# Allegro board msd_foot_main.brd
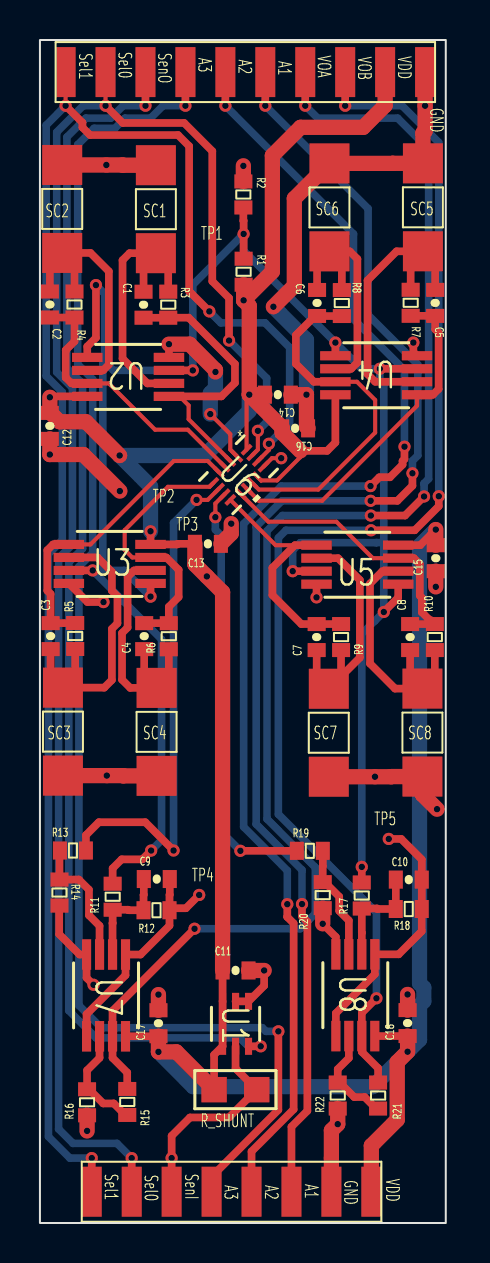
[diagram p0: board, top side]
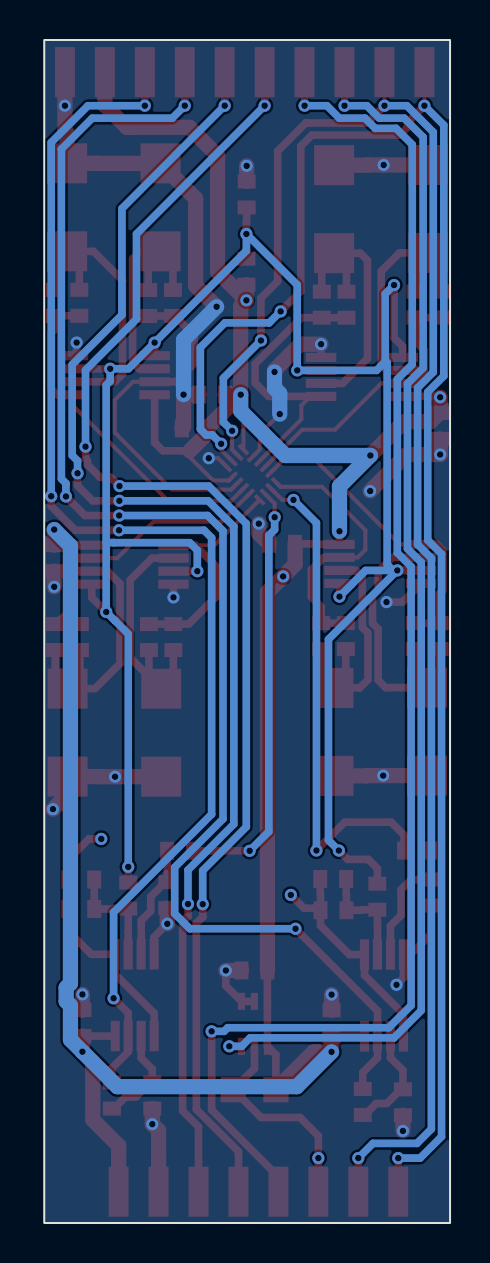
[diagram p1: board, bottom side, seen from below]

Outline 20.32 x 59.17 mm; copper layers: TOP, BOTTOM. Coordinates in mm from the lower left corner of the outline.
Outline path: rectangle 0,0 20.32,59.17

## Design rules (mm)
constraint set DEFAULT: min track width 0.381

## Placement (name value [footprint] x y rotation side)
C1  47pF  [0402-CAP]  5.19 45.93 270 top
C2  47pF  [0402-CAP]  0.5 45.94 270 top
C3  47pF  [0402-CAP]  0.53 29.35 90 top
C4  47pF  [0402-CAP]  5.22 29.35 90 top
C5  47pF  [0402-CAP]  19.79 46.02 270 top
C6  47pF  [0402-CAP]  13.88 46.02 270 top
C7  47pF  [0402-CAP]  13.86 29.31 90 top
C8  47pF  [0402-CAP]  18.53 29.31 90 top
C9  470p  [0402-CAP]  5.85 17.2 0 top
C10  470p  [0402-CAP]  18.47 17.18 0 top
C11  0.1u  [0402-CAP]  9.79 12.63 180 top
C12  0.1u  [0402-CAP]  0.5 39.87 90 top
C13  0.1u  [0402-CAP]  8.41 33.97 180 top
C14  0.1u  [0402-CAP]  11.91 41.43 180 top
C15  0.1u  [0402-CAP]  19.82 33.25 90 top
C16  0.1uF  [0402-CAP]  12.78 39.75 180 top
C17  0.1uF  [0402-CAP]  5.93 9.99 90 top
C18  0.1uF  [0402-CAP]  18.41 10 90 top
IO1  -  [EXT1_MAIN_CONNECTOR]  9.59 1.56 270 top
IO2  MAIN_NANO_CONNECTOR  [MAIN_CONNECTOR]  10.28 57.56 270 top
NOREF  -  []  -42.31 -125.64 0 top
NOREF#2  -  []  20.32 0 90 top
NOREF#3  -  []  0 59.17 0 top
R1  10k  [0402-RES]  10.2 47.58 270 top
R2  1k  [0402-RES]  10.19 51.44 270 top
R3  20k  [0402-RES]  6.42 45.93 270 top
R4  20k  [0402-RES]  1.73 45.94 270 top
R5  20k  [0402-RES]  1.77 29.36 90 top
R6  20k  [0402-RES]  6.45 29.35 90 top
R7  20k  [0402-RES]  18.56 46.02 270 top
R8  20k  [0402-RES]  15.12 46.01 270 top
R9  20k  [0402-RES]  15.08 29.31 90 top
R10  20k  [0402-RES]  19.77 29.31 90 top
R11  100k  [0402-RES]  3.64 16.32 90 top
R12  100k  [0402-RES]  5.84 15.64 180 top
R13  100k  [0402-RES]  1.65 18.63 180 top
R14  120k  [0402-RES]  0.98 16.53 90 top
R15  20k  [0402-RES]  4.37 6.06 270 top
R16  10k  [0402-RES]  2.36 6.04 90 top
R17  100k  [0402-RES]  16.11 16.38 90 top
R18  100k  [0402-RES]  18.47 15.7 180 top
R19  100k  [0402-RES]  13.51 18.62 0 top
R20  120k  [0402-RES]  14.16 16.4 90 top
R21  20k  [0402-RES]  16.93 6.38 270 top
R22  10k  [0402-RES]  14.91 6.38 90 top
R_SHUNT  1  [SMR0805]  10.85 6.67 180 top
SC1  Strain Cell  [STRAIN_CELL]  5.8 50.71 270 top
SC2  Strain Cell  [STRAIN_CELL]  1.12 50.72 270 top
SC3  Strain Cell  [STRAIN_CELL]  1.15 24.58 90 top
SC4  Strain Cell  [STRAIN_CELL]  5.84 24.56 90 top
SC5  Strain Cell  [STRAIN_CELL]  19.17 50.8 270 top
SC6  Strain Cell  [STRAIN_CELL]  14.5 50.8 270 top
SC7  Strain Cell  [STRAIN_CELL]  14.46 24.52 90 top
SC8  Strain Cell  [STRAIN_CELL]  19.15 24.53 90 top
U1  INA212AIDCKTG4  [DCK6_TEX]  9.79 9.96 270 top
U2  MCP6002-IMS  [MSOP8_MC_MCH]  4.41 42.32 180 top
U3  MCP6002-IMS  [MSOP8_MC_MCH]  3.49 32.96 0 top
U4  MCP6002-IMS  [MSOP8_MC_MCH]  16.84 42.4 180 top
U5  MCP6002-IMS  [MSOP8_MC_MCH]  15.89 32.93 0 top
U6  TMUX1109RSVR  [RSV16_TEX]  9.94 37.42 315 top
U7  MCP6002-IMS  [MSOP8_MC_MCH]  3.31 11.38 270 top
U8  MCP6002-IMS  [MSOP8_MC_MCH]  15.79 11.39 270 top

## Library data of the parts
C1-C18 = CAP NP
IO1 = EXT1_MAIN_CONNECTOR_0
IO2 = MAIN_NANO_CONNECTOR_1
R1-R22 R_SHUNT = R
SC1-SC8 = Strain Cell
U1 = INA212AIDCKT
U2-U5 U7 U8 = MCP6002-IMS
U6 = TMUX1109RSVR

## Footprints (pads in the part's own frame, mm; a bottom-side part is the same pattern mirrored in y, then rotated)
0402-CAP
  rect 0.7x0.9 smd: 1(-0.65,0) 2(0.65,0)
0402-RES
  rect 0.7x0.9 smd: 1(-0.65,0) 2(0.65,0)
DCK6_TEX
  rect 0.851x0.356 smd: 1(-1.124,0.65) 2(-1.124,0) 3(-1.124,-0.65) 4(1.124,-0.65) 5(1.124,0) 6(1.124,0.65)
EXT1_MAIN_CONNECTOR
  rect 2.5x1 smd: 1(0,7) 2(0,5) 3(0,3) 4(0,1) 5(0,-1) 6(0,-3) 7(0,-5) 8(0,-7)
MAIN_CONNECTOR
  rect 2.5x1 smd: 1(0,9) 2(0,7) 3(0,5) 4(0,3) 5(0,1) 6(0,-1) 7(0,-3) 8(0,-5) 9(0,-7) 10(0,-9)
MSOP8_MC_MCH
  rect 1.524x0.457 smd: 1(-2.045,0.975) 2(-2.045,0.325) 3(-2.045,-0.325) 4(-2.045,-0.975) 5(2.045,-0.975) 6(2.045,-0.325) 7(2.045,0.325) 8(2.045,0.975)
RSV16_TEX
  rect 0.75x0.2 smd: 1(-0.724,0.6)
  rect 0.65x0.2 smd: 2(-0.775,0.2) 3(-0.775,-0.2) 4(-0.775,-0.6) 9(0.775,-0.6) 10(0.775,-0.2) 11(0.775,0.2) 12(0.775,0.6)
  rect 0.2x0.65 smd: 5(-0.6,-1.175) 6(-0.2,-1.175) 7(0.2,-1.175) 8(0.6,-1.175) 13(0.6,1.175) 14(0.2,1.175) 15(-0.2,1.175) 16(-0.6,1.175)
SMR0805
  rect 1.27x1.27 smd: 1(0,0) 2(2.134,0)
STRAIN_CELL
  rect 2x2 smd: 1(-2.2,0) 2(2.2,0)

## Nets
GND: C11.1 C12.1 C13.1 C14.1 C15.1 C16.1 C17.2 C18.2 IO1.2 IO2.1 R2.1 R14.1 R16.1 R20.1 R22.1 SC1.1 SC2.1 SC3.1 SC4.1 SC5.1 SC6.1 SC7.1 SC8.1 U1.1 U1.2 U2.4(VSS) U3.4(VSS) U4.4(VSS) U5.4(VSS) U6.1(VSS) U6.13 U7.4(VSS) U8.4(VSS)
VDD: C11.2 C12.2 C13.2 C14.2 C15.2 C16.2 C17.1 C18.1 IO1.1(VDD) IO2.2 R1.2 R_SHUNT.2 U1.3(V+) U1.4 U2.8 U3.8 U4.8 U5.8 U6.12 U6.16 U7.8 U8.8
SC1: C1.1 R3.1 SC1.2 U2.2
SC1_VOUT1: C1.2 R3.2 U2.1 U6.2
SC2: C2.1 R4.1 SC2.2 U2.6
SC2_VOUT1: C2.2 R4.2 U2.7 U6.3
SC3: C3.1 R5.1 SC3.2 U3.2
SC3_VOUT1: C3.2 R5.2 U3.1 U6.4
SC4: C4.1 R6.1 SC4.2 U3.6
SC4_VOUT1: C4.2 R6.2 U3.7 U6.5
SC5: C5.1 R7.1 SC5.2 U4.2
SC5_VOUT1: C5.2 R7.2 U4.1 U6.10
SC6: C6.1 R8.1 SC6.2 U4.6
SC6_VOUT1: C6.2 R8.2 U4.7 U6.11
SC7: C7.1 R9.1 SC7.2 U5.2
SC7_VOUT1: C7.2 R9.2 U5.1 U6.8
SC8: C8.1 R10.1 SC8.2 U5.6
SC8_VOUT1: C8.2 R10.2 U5.7 U6.9
SEL0: IO1.7 IO2.9 U6.15
SEL1: IO1.8 IO2.10 U6.14
SENSE_IN: IO1.6 R_SHUNT.1 U1.5
SENSE_OUT: IO2.8(SENSE) U1.6
VOUT1_A: R13.1 U6.6
VOUT1_B: R19.1 U6.7
VOUT2_A: C9.2 R12.1 U7.1 U7.5
VOUT2_B: C10.2 R18.1 U8.1 U8.5
VOUT3_A: IO2.4 R15.1 U7.7
VOUT3_B: IO2.3 R21.1 U8.7
VREF: R1.1 R2.2 R11.2 R17.2 U2.3 U2.5 U3.3 U3.5 U4.3 U4.5 U5.3 U5.5
N44752: IO1.5 IO2.7
N44756: IO1.4 IO2.6
N44760: IO1.3 IO2.5
N63015: C9.1 R11.1 R12.2 U7.2
N63095: R15.2 R16.2 U7.6
N63123: R13.2 R14.2 U7.3
N63670: C10.1 R17.1 R18.2 U8.2
N63750: R21.2 R22.2 U8.6
N63778: R19.2 R20.2 U8.3

## Via types
v1: diameter 0.61, hole 0.33, TOP to BOTTOM, 81 vias

## Routing (per net, layer and track width the routed paths; a pad name or vN(x,y) marks a point on that pad's centre or on a via; arc(x,y) is an arc through that point)
GND: length 79.5
  TOP w0.203: 11.19,37.83 11.62,38.25 v1(12.08,38.25) ; v1(8.53,40.46) 9.53,39.46 9.53,38.68 U6.1
  TOP w0.381: U4.4 18.7,43.56 v1(18.7,44.04) ; U3.4 2.38,31.06 v1(3.18,31.06) ; v1(2.68,11.92) 2.33,12.26 U7.4 1.98,13.43 0.97,14.44 0.97,15.87 R14.1 ; v1(11.23,12.63) 11.23,11.87 U1.1 U1.2 ; U5.4 v1(13.85,31.29) ; U8.4 14.82,14.31 v1(14.16,14.97) ; U2.4 v1(6.46,43.95)
  TOP w0.762: C13.1 9.58,34.49 v1(9.58,34.98) ; v1(4,36.61) 2.17,38.44 v1(0.5,38.44) C12.1 ; SC3.1 v1(3.35,22.38) 4.16,22.38 4.17,22.36 SC4.1 ; SC2.1 v1(3.32,52.92) 4.14,52.92 4.15,52.91 SC1.1 ; SC7.1 v1(16.77,22.32) 17.59,22.32 17.59,22.33 SC8.1 19.15,21.43 v1(19.88,20.7) ; R22.1 v1(14.91,4.94) 14.59,4.63 IO1.2 ; R2.1 v1(10.19,52.87) ; v1(8.79,42.57) 8.79,42.66 7.49,43.95 v1(6.46,43.95) ; C14.1 v1(13.34,41.43) 13.34,39.83 C16.1 ; C18.2 v1(18.41,11.43) ; C17.2 v1(5.93,11.42) ; v1(11.69,45.83) 12.74,46.88 12.74,51.24 SC6.1 17.66,53 17.67,53 SC5.1 19.17,54.51 19.28,54.62 v1(19.28,55.88) IO2.1 ; C15.1 v1(19.82,31.82) ; C11.1 v1(11.23,12.63) ; R20.1 v1(14.16,14.97) ; R16.1 v1(2.36,4.61)
  BOTTOM w0.762: v1(13.34,41.43) 13.34,44.17 v1(11.69,45.83) ; v1(8.53,40.46) 8.53,41.49 8.79,41.76 v1(8.79,42.57)
VDD: length 147.2
  TOP w0.203: 13.03,38.62 13.03,38.3 11.87,37.14 11.07,37.14 U6.12 ; v1(10.48,41.43) 10.35,41.29 U6.16
  TOP w0.381: U4.8 14.79,39.03 14.38,38.62 13.03,38.62 ; C17.1 5.93,9.34 U7.8 ; v1(5.54,34.6) U3.8 6.87,33.94 6.9,33.97 C13.2 ; v1(0.5,41.3) 0.54,41.34 U2.8 ; R_SHUNT.2 8.72,8.41 U1.4 U1.3 C11.2 ; v1(19.82,34.68) 19.04,33.9 U5.8 ; C18.1 U8.8
  TOP w0.762: R1.2 v1(10.2,46.15) ; v1(10.2,46.15) 10.48,45.86 v1(10.48,41.43) ; v1(10.2,46.15) 11.64,47.59 11.64,53.39 13.05,54.8 16.18,54.8 17.28,55.9 IO2.2 ; C12.2 0.5,40.56 ; 0.5,40.56 0.98,40.08 2.3,40.08 v1(3.99,38.39) ; 0.5,40.56 v1(0.5,41.3) ; C15.2 v1(19.82,34.68) ; R_SHUNT.2 6.83,8.56 v1(5.93,8.56) C17.1 ; v1(10.48,41.43) 12.13,39.78 C16.2 12.13,39.53 13.03,38.62 ; v1(10.48,41.43) C14.2 ; C13.2 7.76,32.94 v1(8.36,32.34) 9.14,31.55 C11.2 ; C18.1 v1(18.41,8.57) 17.89,8.05 17.89,5.16 16.59,3.87 IO1.1
  BOTTOM w0.762: v1(19.82,34.68) 19.01,33.87 19.01,11.98 19.22,11.77 19.22,11.09 19.01,10.88 19.01,9.17 v1(18.41,8.57) 16.66,6.82 7.67,6.82 v1(5.93,8.56) ; v1(10.48,41.43) 10.48,40.62 8.25,38.39 v1(3.99,38.39) 5.54,36.84 v1(5.54,34.6)
SC1: length 13.9
  TOP w0.381: U2.2 5.38,41.99 4.14,43.24 4.14,48.15 4.49,48.51 SC1.2 ; SC1.2 6.42,47.89 R3.1 ; SC1.2 5.19,47.89 C1.1
SC1_VOUT1: length 14.3
  TOP w0.203: U6.2 7.45,40.2 7.45,40.89 6.99,41.34
  TOP w0.381: C1.2 6.42,45.28 R3.2 7.45,45.28 9.76,42.96 9.76,42.02 9.09,41.34 U2.1
SC2: length 13
  TOP w0.381: SC2.2 0.5,47.9 C2.1 ; SC2.2 1.73,47.9 R4.1 ; SC2.2 2.53,48.52 3.45,47.6 3.45,42.93 3.16,42.64 U2.6
SC2_VOUT1: length 14.2
  TOP w0.203: U2.7 3.45,41.99 5.77,39.68 7.4,39.68 9.25,37.83
  TOP w0.381: U2.7 1.58,41.99 1.29,42.28 1.29,43.65 1.73,44.09 R4.2 C2.2
SC3: length 15.1
  TOP w0.381: R5.1 1.77,27.39 SC3.2 ; SC3.2 0.53,27.39 C3.1 ; SC3.2 3.22,26.78 3.6,27.16 3.6,29.72 3.88,29.99 3.88,31.35 3.6,31.63 3.6,32.57 2.88,33.29 U3.2
SC3_VOUT1: length 15.6
  TOP w0.203: U6.4 8.4,38.11 6.7,38.11 2.53,33.94 U3.1
  TOP w0.381: U3.1 0.66,33.94 0.37,33.65 0.37,31.63 0.53,31.46 C3.2 1.76,30 R5.2
SC4: length 12.8
  TOP w0.381: SC4.2 5.22,27.38 C4.1 ; SC4.2 4.52,26.76 4.11,27.18 4.11,29.51 4.39,29.78 4.39,32.32 4.71,32.64 U3.6 ; SC4.2 6.45,27.38 R6.1
SC4_VOUT1: length 13.6
  TOP w0.203: U3.7 4.62,33.29 4.24,33.67 4.24,34.65 6.41,36.82 8.49,36.82 U6.5
  TOP w0.381: C4.2 6.45,30 R6.2 6.45,30.82 6.94,31.31 6.94,32.67 6.33,33.29 U3.7
SC5: length 15.1
  TOP w0.381: C5.1 19.79,47.99 SC5.2 ; SC5.2 18.56,47.99 R7.1 ; SC5.2 17.86,48.6 16.4,47.15 16.4,42.83 16.4,42.82 16.4,42.47 16.79,42.08 U4.2
SC5_VOUT1: length 17.5
  TOP w0.203: U4.1 18.88,40.88 14.13,36.13 10.95,36.13 U6.10
  TOP w0.381: U4.1 19.67,41.43 19.96,41.71 19.96,44.53 19.79,44.7 C5.2 19.78,45.37 R7.2
SC6: length 12.3
  TOP w0.381: SC6.2 15.51,48.6 15.9,48.22 15.9,43.04 15.58,42.73 U4.6 ; SC6.2 13.88,47.98 C6.1 ; SC6.2 15.12,47.98 R8.1
SC6_VOUT1: length 18
  TOP w0.203: U4.7 15.87,42.08 16.78,41.16 16.78,39.53 13.93,36.68 10.96,36.68 U6.11
  TOP w0.381: R8.2 13.88,45.36 C6.2 13.78,45.37 12.81,44.41 12.81,42.97 13.71,42.08 U4.7
SC7: length 12.2
  TOP w0.381: 15.08,27.34 16.02,28.28 16.02,32.16 14.93,33.25 U5.2 ; 15.08,27.34 R9.1 ; 15.08,27.34 SC7.2 13.86,27.33 C7.1
SC7_VOUT1: length 12.3
  TOP w0.203: U6.8 11.8,33.9 12.77,33.9
  TOP w0.381: U5.1 12.77,33.9 11.64,32.77 11.64,31.41 13.09,29.96 C7.2 R9.2
SC8: length 13.2
  TOP w0.381: SC8.2 19.77,27.35 R10.1 ; SC8.2 18.53,27.35 C8.1 ; SC8.2 17.78,26.73 16.53,27.98 16.53,31.98 17.15,32.6 U5.6
SC8_VOUT1: length 15
  TOP w0.203: U6.9 11.44,35.07 14.84,35.07 16.67,33.25 U5.7
  TOP w0.381: C8.2 R10.2 19.59,30.14 19.53,30.14 19.12,30.55 19.12,31.27 19.02,31.38 19.02,32.96 18.73,33.25 U5.7
SEL0: length 84
  TOP w0.203: IO2.9 v1(3.28,55.88) ; v1(10.91,39.62) 10.91,38.68 U6.15
  TOP w0.381: v1(9.47,44.14) 9.47,46.26 8.63,47.1 8.63,53.61 7.22,55.02 4.15,55.02 v1(3.28,55.88) ; IO1.7 v1(4.59,3.25)
  BOTTOM w0.381: v1(4.59,3.25) 3.86,3.98 1.65,3.98 0.93,4.7 0.93,33.25 1.63,33.94 1.63,41.77 0.84,42.55 0.84,54.56 2.16,55.88 v1(3.28,55.88) ; v1(10.91,39.62) 11.35,40.06 11.35,42.25 v1(9.47,44.14)
SEL1: length 85.7
  TOP w0.203: U6.14 11.46,38.67 v1(11.46,38.97) ; IO2.10 v1(1.28,55.88)
  TOP w0.381: v1(8.48,45.59) 7.47,46.61 7.47,53.86 6.92,54.41 2.51,54.41 2.13,54.8 2.13,55.04 v1(1.28,55.88) ; IO1.8 v1(2.59,3.25)
  BOTTOM w0.381: v1(8.48,45.59) 9.06,45.02 11.27,45.02 12.5,43.79 12.5,39.7 12.21,39.41 11.9,39.41 v1(11.46,38.97) ; v1(2.59,3.25) 1.5,3.25 0.43,4.32 0.43,33.46 1.12,34.15 1.12,41.56 0.31,42.36 0.31,54.91 v1(1.28,55.88)
SENSE_IN: length 10.6
  TOP w0.381: IO1.6 v1(6.59,3.25) 6.59,4.36 7.51,5.28 9.46,5.28 R_SHUNT.1 9.79,7.73 U1.5
SENSE_OUT: length 61.5
  TOP w0.381: IO2.8 v1(5.28,55.88) ; U1.6 v1(11.05,8.84)
  BOTTOM w0.381: v1(5.28,55.88) 4.16,55.88 3.54,55.26 2.3,55.26 1.35,54.31 1.35,42.76 2.13,41.98 2.13,33.73 1.44,33.04 1.44,10.63 2.81,9.26 10.01,9.26 10.43,8.84 v1(11.05,8.84)
VOUT1_A: length 25.4
  TOP w0.203: U6.6 8.4,36.17 v1(7.84,36.17)
  TOP w0.381: v1(6.69,18.63) 5.28,20.05 2.95,20.05 2.3,19.4 R13.1
  BOTTOM w0.381: v1(6.69,18.63) 6.69,35.02 v1(7.84,36.17)
VOUT1_B: length 21.4
  TOP w0.203: v1(8.78,35.3) 8.78,35.99 U6.7
  TOP w0.381: R19.1 v1(10.04,18.62)
  BOTTOM w0.381: v1(8.78,35.3) 8.78,34.68 9.08,34.39 9.08,19.58 v1(10.04,18.62)
VOUT2_A: length 11.8
  TOP w0.381: 6.49,15.74 6.49,16.41 6.5,16.42 C9.2 ; 6.49,15.74 R12.1 6.49,14.88 5.04,13.43 U7.1 4.28,12.39 2.33,10.44 U7.5 ; 6.49,15.74 7.31,15.74 v1(7.97,16.41)
VOUT2_B: length 13.4
  TOP w0.381: U8.5 14.82,10.49 16.77,12.44 U8.1 17.96,13.44 19.12,14.59 R18.1 19.12,15.71 C10.2 19.12,18.18 18.09,19.21 v1(17.47,19.21)
VOUT3_A: length 71.3
  TOP w0.381: v1(16.57,35.38) 18.28,35.38 v1(19.23,36.34) ; v1(7.74,14.72) 3.63,10.61 U7.7 3.63,8.26 4.37,7.52 R15.1 ; IO2.4 v1(13.28,55.88)
  BOTTOM w0.381: v1(16.57,35.38) 12.14,35.38 11.37,34.62 11.37,20.21 13.79,17.79 13.79,15.48 13.03,14.72 v1(7.74,14.72) ; v1(19.23,36.34) 19.23,36.96 19.23,36.99 19.46,37.22 19.46,53.71 17.91,55.26 13.91,55.26 v1(13.28,55.88)
VOUT3_B: length 64
  TOP w0.381: v1(19.97,36.35) 19.97,35.85 18.77,34.65 v1(16.58,34.65) ; 16.83,7.03 R21.1 16.93,7.74 16.12,8.56 U8.7 16.12,10.51 v1(16.85,11.24) ; IO2.3 v1(15.28,55.88)
  BOTTOM w0.381: v1(16.58,34.65) 12.32,34.65 11.94,34.27 11.94,20.44 16.85,15.53 v1(16.85,11.24) ; v1(15.28,55.88) 18.13,55.88 19.97,54.04 v1(19.97,36.35)
VREF: length 106.2
  TOP w0.381: U2.3 v1(7.65,42.64) ; U5.5 17.94,31.28 v1(17.22,30.56) ; U5.3 v1(12.65,32.6) ; U3.5 v1(5.54,31.33) ; U4.3 v1(17.02,42.73) ; U2.5 2.37,43.84 2.8,44.27 v1(2.8,46.91) ; R1.1 v1(10.2,49.47) 10.2,50.13 10.19,50.13 R2.2 ; v1(5.57,18.63) 5.13,18.19 4.09,18.19 3.64,17.74 R11.2 ; R17.2 v1(16.11,17.81) ; U3.3 v1(2.64,32.64) ; U4.5 v1(14.79,44.04)
  BOTTOM w0.381: 2.85,32.64 4.23,32.64 v1(5.54,31.33) ; 2.85,32.64 3.15,32.94 3.15,43.02 3.23,43.1 ; 2.85,32.64 v1(2.64,32.64) 6.09,29.19 6.09,19.15 v1(5.57,18.63) ; 3.23,43.1 3.24,43.12 3.24,46.47 v1(2.8,46.91) ; 3.23,43.1 3.68,42.64 v1(7.65,42.64) 7.65,46.92 v1(10.2,49.47) 10.2,48.63 v1(14.79,44.04) 16.1,42.73 v1(17.02,42.73) 17.02,42.1 17.22,41.9 17.22,34.03 ; 17.22,34.03 16.84,34.03 16.84,34.03 13.04,34.03 12.65,33.64 v1(12.65,32.6) ; 17.22,34.03 v1(17.22,30.56) 16.78,30.12 16.77,30.12 16.11,29.47 v1(16.11,17.81)
N44752: length 71.5
  TOP w0.381: IO2.7 v1(7.28,55.88) ; IO1.5 8.59,2.31 11.94,5.66 v1(11.94,9.59)
  BOTTOM w0.381: v1(7.28,55.88) 6.16,55.88 5.54,55.26 4.26,55.26 3.75,54.75 2.71,54.75 1.89,53.93 1.89,42.95 2.64,42.2 2.64,33.52 1.95,32.83 1.95,10.88 3.07,9.77 11.13,9.77 11.32,9.59 v1(11.94,9.59)
N44756: length 67.9
  TOP w0.381: IO2.6 v1(9.28,55.88) ; v1(12.39,15.95) 12.39,15.31 12.7,14.99 12.7,5.68 10.59,3.58 IO1.4 ; v1(18.25,38.83) 18.25,38.21 18.16,38.11 18.16,37.93 17.52,37.3 16.99,37.3 v1(16.55,36.86)
  BOTTOM w0.381: v1(16.55,36.86) 12.09,36.86 10.2,34.97 10.2,19.81 12.39,17.63 v1(12.39,15.95) ; v1(9.28,55.88) 15.7,49.47 15.7,45.21 18.25,42.66 v1(18.25,38.83)
N44760: length 67.3
  TOP w0.381: v1(13.12,15.95) 13.12,15.33 13.39,15.06 13.39,5.61 12.59,4.81 IO1.3 ; IO2.5 v1(11.28,55.88) ; v1(18.65,37.5) 18.65,36.88 17.9,36.12 v1(16.56,36.12)
  BOTTOM w0.381: v1(13.12,15.95) 13.12,17.66 10.83,19.95 10.83,34.83 12.11,36.12 v1(16.56,36.12) ; v1(18.65,37.5) 18.65,38.12 18.92,38.39 18.92,42.93 16.43,45.42 16.43,50.74 v1(11.28,55.88)
N63015: length 5.4
  TOP w0.381: C9.1 5.2,16.42 5.19,16.41 R12.2 4.43,15.64 4.41,15.67 R11.1 3.64,15 3.63,15 U7.2
N63095: length 5.5
  TOP w0.381: R15.2 4.27,5.41 3.7,5.98 3.17,5.98 2.46,6.69 R16.2 2.36,7.64 2.98,8.26 U7.6
N63123: length 6.6
  TOP w0.381: U7.3 2.98,14.86 2.45,15.39 2.45,16.67 1.95,17.18 R14.2 0.98,18.61 R13.2
N63670: length 5.5
  TOP w0.381: C10.1 17.82,15.71 R18.2 16.91,15.7 16.88,15.73 R17.1 16.11,14.52 16.12,14.52 U8.2
N63750: length 5.1
  TOP w0.381: R21.2 16.83,5.73 16.26,6.3 15.74,6.3 15.01,7.03 R22.2 14.91,7.69 15.47,8.25 U8.6
N63778: length 5.8
  TOP w0.381: R19.2 14.16,17.85 14.16,17.84 R20.2 14.26,17.05 14.99,16.32 14.99,15.61 15.47,15.13 U8.3

## Copper pours and planes (outline as drawn; the poured copper is in the pictures)
GND on BOTTOM: 0.01,59.16 20.31,59.16 20.31,0.01 0.01,0.01

## Text on the board
Ref Des/Silkscreen Top: TP2 | TP3 | TP4 | TP1 | * | TP5 | Sel1 | Sel0 | SenO | SenI | A3 | A2 | A1 | VOA | GND | VOB | VDD
XSECTION_CHART: *  SURFACE | L1 TOP CONDUCTOR | *  DIELECTRIC | L2 BOTTOM CONDUCTOR | DESIGN CROSS SECTION CHART | ___________________________ | TOTAL THICKNESS 10.4 MIL | 1-2
DIMENSION: FIGURE | FINISHED_SIZE | 13.0 | DRILL CHART: TOP to BOTTOM | ALL UNITS ARE IN MILS | PLATED | QTY | 81
